# Altium PCB F800GSDayLight_line10x230 for Nuts.PcbDoc
Units mm, origin at the board's own origin, x right, y up, seen from the top; angles counter-clockwise.
Board outline 230 x 10 mm, 4 copper layers (Top Layer, Internal Plane 1, Internal Plane 2, Bottom Layer), stack 0.462 mm thick; 44 components, 24 nets, 88 pads, 15 vias.
Unrouted connection lines stored in the file: 58.
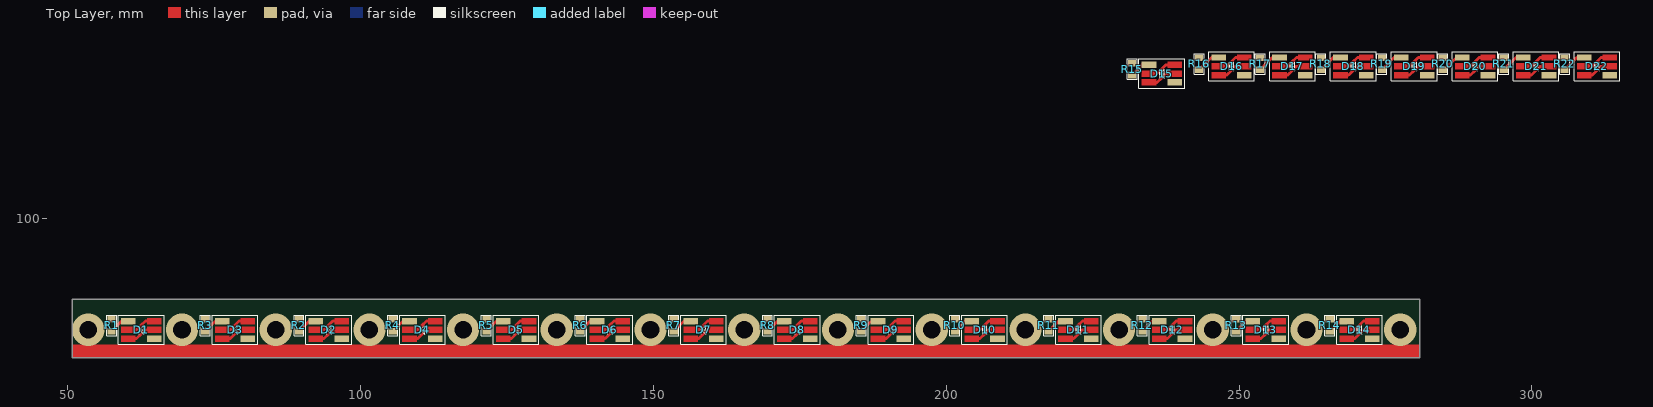
[diagram p0: Top Layer view]
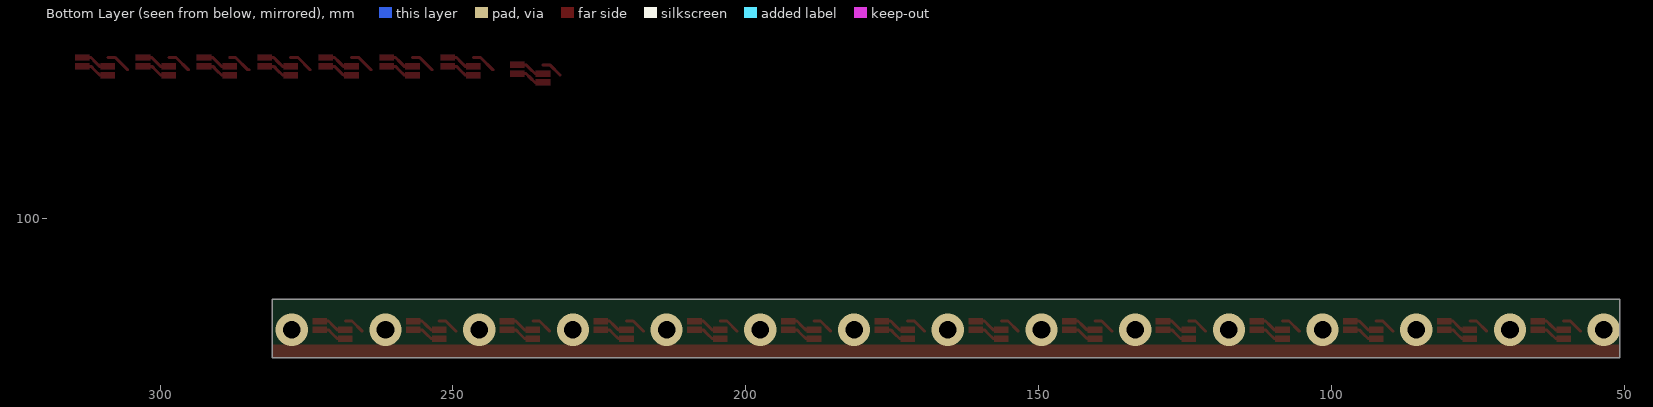
[diagram p1: Bottom Layer view, seen from below]
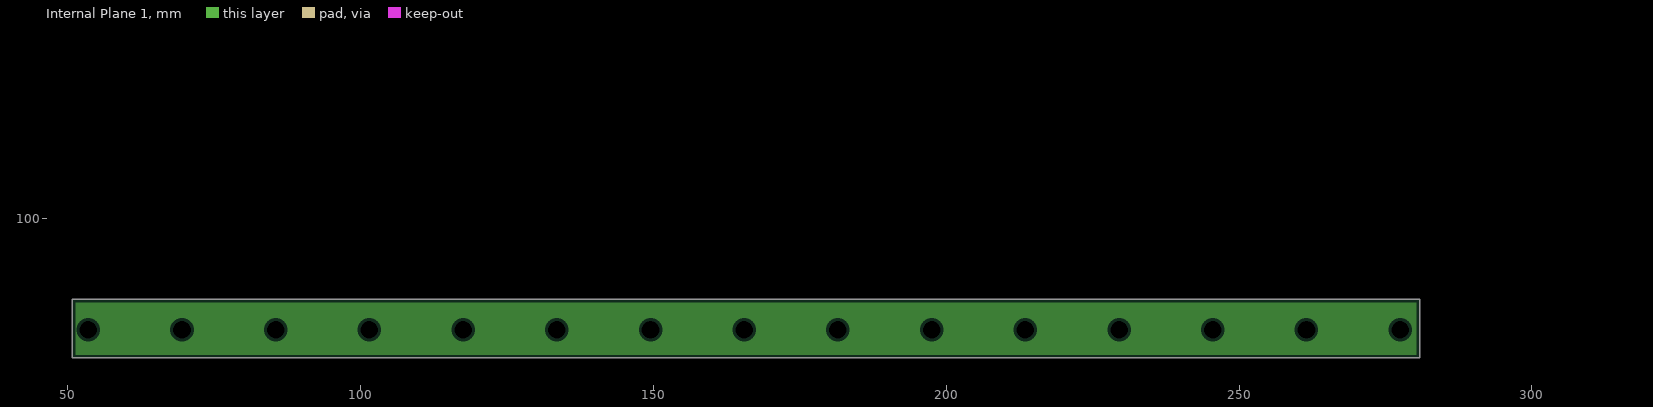
[diagram p2: Internal Plane 1, clearances drawn from the general rule]
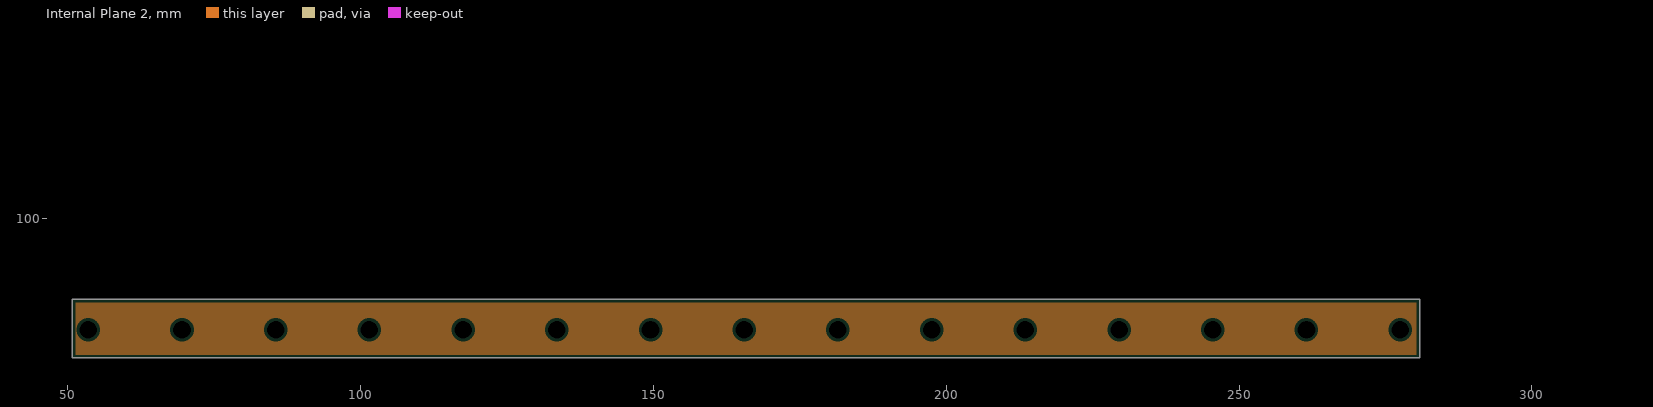
[diagram p3: Internal Plane 2, clearances drawn from the general rule]

## Layer stack, top to bottom
Top Solder: solder mask 0.0102, Solder Resist, Dk 3.5
Top Layer: signal copper 0.0356
Internal Plane 1: plane copper 0.0356
Internal Plane 2: plane copper 0.0356
Dielectric 1: dielectric 0.32, FR-4, Dk 4.8
Bottom Layer: signal copper 0.0356
Bottom Solder: solder mask 0.0102, Solder Resist, Dk 3.5

## Board outline
50.8,76.2 280.8,76.2 280.8,86.2 50.8,86.2

## Design rules (kind name [scope] priority, off if disabled: settings)
Clearance [All] p1: gap=0.2
PlaneClearance [All] p1: clearance=0.508
PlaneConnect [All] p1: planeconnectstyle=Relief reliefexpansion=0.508 reliefentries=4 reliefconductorwidth=0.254 reliefairgap=0.254
PolygonConnect [All] p1: connectstyle=Relief reliefconductorwidth=0.254 reliefentries=4 polygonreliefangle="90 Angle" airgapwidth=0.254
RoutingVias [All] p1: holewidth=0.4 width=3 viastyle="Through Hole" minholewidth=0.711 minwidth=1.27 maxholewidth=0.711 maxwidth=1.27
SolderMaskExpansion [All] p1: expansion=0.102
Width [All] p1: maxlimit=2 minlimit=0.2 preferedwidth=1
27 further rules are at their usual default settings.

## Components (designator, comment, footprint, x,y, rotation, side; value= is the part's Value field where it differs from the comment)
D1 "Cold White" "LED SMD 5050 White compact R" 64.75,79.5 r180 top
D2 "Cold White" "LED SMD 5050 White compact R" 96.75,79.5 r180 top
D3 "Cold White" "LED SMD 5050 White compact R" 80.75,79.5 r180 top
D4 "Cold White" "LED SMD 5050 White compact R" 112.75,79.5 r180 top
D5 "Cold White" "LED SMD 5050 White compact R" 128.75,79.5 r180 top
D6 "Cold White" "LED SMD 5050 White compact R" 144.75,79.5 r180 top
D7 "Cold White" "LED SMD 5050 White compact R" 160.75,79.5 r180 top
D8 "Cold White" "LED SMD 5050 White compact R" 176.75,79.5 r180 top
D9 "Cold White" "LED SMD 5050 White compact R" 192.75,79.5 r180 top
D10 "Cold White" "LED SMD 5050 White compact R" 208.75,79.5 r180 top
D11 "Cold White" "LED SMD 5050 White compact R" 224.75,79.5 r180 top
D12 "Cold White" "LED SMD 5050 White compact R" 240.75,79.5 r180 top
D13 "Cold White" "LED SMD 5050 White compact R" 256.75,79.5 r180 top
D14 "Cold White" "LED SMD 5050 White compact R" 272.75,79.5 r180 top
D15 "Cold White" "LED SMD 5050 White compact R" 239,123.25 r180 top
D16 "Cold White" "LED SMD 5050 White compact R" 250.9,124.5 r180 top
D17 "Cold White" "LED SMD 5050 White compact R" 261.3,124.5 r180 top
D18 "Cold White" "LED SMD 5050 White compact R" 271.7,124.5 r180 top
D19 "Cold White" "LED SMD 5050 White compact R" 282.1,124.5 r180 top
D20 "Cold White" "LED SMD 5050 White compact R" 292.5,124.5 r180 top
D21 "Cold White" "LED SMD 5050 White compact R" 302.9,124.5 r180 top
D22 "Cold White" "LED SMD 5050 White compact R" 313.3,124.5 r180 top
R1 "240Om" "SMD 0805 (2012)" 57.5,80.75 r90 top
R2 "240Om" "SMD 0805 (2012)" 89.5,80.75 r90 top
R3 "240Om" "SMD 0805 (2012)" 73.5,80.75 r90 top
R4 "240Om" "SMD 0805 (2012)" 105.5,80.75 r90 top
R5 "240Om" "SMD 0805 (2012)" 121.5,80.75 r90 top
R6 "240Om" "SMD 0805 (2012)" 137.5,80.75 r90 top
R7 "240Om" "SMD 0805 (2012)" 153.5,80.75 r90 top
R8 "240Om" "SMD 0805 (2012)" 169.5,80.75 r90 top
R9 "240Om" "SMD 0805 (2012)" 185.5,80.75 r90 top
R10 "240Om" "SMD 0805 (2012)" 201.5,80.75 r90 top
R11 "240Om" "SMD 0805 (2012)" 217.5,80.75 r90 top
R12 "240Om" "SMD 0805 (2012)" 233.5,80.75 r90 top
R13 "240Om" "SMD 0805 (2012)" 249.5,80.75 r90 top
R14 "240Om" "SMD 0805 (2012)" 265.5,80.75 r90 top
R15 "240Om" "SMD 0805 (2012)" 231.75,124.5 r90 top
R16 "240Om" "SMD 0805 (2012)" 243.2,125.4 r90 top
R17 "240Om" "SMD 0805 (2012)" 253.6,125.4 r90 top
R18 "240Om" "SMD 0805 (2012)" 264,125.4 r90 top
R19 "240Om" "SMD 0805 (2012)" 274.4,125.4 r90 top
R20 "240Om" "SMD 0805 (2012)" 284.8,125.4 r90 top
R21 "240Om" "SMD 0805 (2012)" 295.2,125.4 r90 top
R22 "240Om" "SMD 0805 (2012)" 305.6,125.4 r90 top

## Footprints (in the part's own frame and the unit in brackets; to place one, negate y for a bottom-side part, rotate by r counter-clockwise, add the part's x,y. Pads: shape width x height; smd on the part's side, far side on the other; paste and mask are expansions set on the pad)
"LED SMD 5050 White compact R" [mm]
  rect 2.5x1.1 smd: A(0,0) K(4.4,-3)
  Top Layer region: 3.15,-0.55 5.65,-0.55 5.65,0.55 3.15,0.55
  Top Layer region: 3.15,-2.05 5.65,-2.05 5.65,-0.95 3.15,-0.95
  Top Layer region: -1.25,-2.05 1.25,-2.05 1.25,-0.95 -1.25,-0.95
  Top Layer region: -1.25,-3.55 1.25,-3.55 1.25,-2.45 -1.25,-2.45
  Top Layer lines w0.5: 4.4,0 3,0 2.2,-0.8 1.5,-1.5 0,-1.5 ; 4.4,-1.5 3,-1.5 2.3,-2.2 1.5,-3 0,-3
  silkscreen extent -1.7,-4 6.1,1, body extent -0.45,-4 4.85,1, height 1.6
"SMD 0805 (2012)" [mil]
  rect 45x55 smd: 1(0.35,0.98) 2(80.35,0.98)
  silkscreen extent -29,-32 109,34, body extent 1,-24 80,26, height 18

## Part data
D1 D2 D3 D4 D5 D6 D7 D8 D9 D10 D11 D12 D13 D14 D15 D16 D17 D18 D19 D20 D21 D22: library part "Led SMD White Cold", "?3v ?20mA"
R1 R2 R3 R4 R5 R6 R7 R8 R9 R10 R11 R12 R13 R14 R15 R16 R17 R18 R19 R20 R21 R22: library part "Res All Types"

## Via types
v1: diameter 5.5, hole 3, Top Layer to Bottom Layer, 15 vias

## Nets (pads, with @x,y where several pads share a name; then routed paths per layer and width w, separated by ;. In a path a pad name is that pad's centre, name@x,y a point inside that pad or via, vN(x,y) a via of type N, cw(c..) or ccw(c..) an arc to the next point about the centre after c; other vN are vias at no path point)
GND: R1.2 R2.2 R3.2 R4.2 R5.2 R6.2 R7.2 R8.2 R9.2 R10.2 R11.2 R12.2 R13.2 R14.2 R15.2 R16.2 R17.2 R18.2 R19.2 R20.2 R21.2 R22.2
  other v1: 53.5,81 69.5,81 85.5,81 101.5,81 117.5,81 133.5,81 149.5,81 165.5,81 181.5,81 197.5,81 213.5,81 229.5,81 245.5,81 261.5,81 277.5,81
NetD1_K: D1.K R1.1 | length 3.6
  Top Layer w0.5: R1.1 59.216,82.5 D1.K
NetD2_K: D2.K R2.1 | length 3.6
  Top Layer w0.5: R2.1 91.216,82.5 D2.K
NetD3_K: D3.K R3.1 | length 3.6
  Top Layer w0.5: R3.1 75.216,82.5 D3.K
NetD4_K: D4.K R4.1 | length 3.6
  Top Layer w0.5: R4.1 107.216,82.5 D4.K
NetD5_K: D5.K R5.1 | length 3.6
  Top Layer w0.5: R5.1 123.216,82.5 D5.K
NetD6_K: D6.K R6.1 | length 3.6
  Top Layer w0.5: R6.1 139.216,82.5 D6.K
NetD7_K: D7.K R7.1 | length 3.6
  Top Layer w0.5: R7.1 155.216,82.5 D7.K
NetD8_K: D8.K R8.1 | length 3.6
  Top Layer w0.5: R8.1 171.216,82.5 D8.K
NetD9_K: D9.K R9.1 | length 3.6
  Top Layer w0.5: R9.1 187.216,82.5 D9.K
NetD10_K: D10.K R10.1 | length 3.6
  Top Layer w0.5: R10.1 203.216,82.5 D10.K
NetD11_K: D11.K R11.1 | length 3.6
  Top Layer w0.5: R11.1 219.216,82.5 D11.K
NetD12_K: D12.K R12.1 | length 3.6
  Top Layer w0.5: R12.1 235.216,82.5 D12.K
NetD13_K: D13.K R13.1 | length 3.6
  Top Layer w0.5: R13.1 251.216,82.5 D13.K
NetD14_K: D14.K R14.1 | length 3.6
  Top Layer w0.5: R14.1 267.216,82.5 D14.K
NetD15_K: D15.K R15.1 | length 3.6
  Top Layer w0.5: R15.1 233.466,126.25 D15.K
NetD16_K: D16.K R16.1 | length 4.2
  Top Layer w0.5: R16.1 245.266,127.5 D16.K
NetD17_K: D17.K R17.1 | length 4.2
  Top Layer w0.5: R17.1 255.666,127.5 D17.K
NetD18_K: D18.K R18.1 | length 4.2
  Top Layer w0.5: R18.1 266.066,127.5 D18.K
NetD19_K: D19.K R19.1 | length 4.2
  Top Layer w0.5: R19.1 276.466,127.5 D19.K
NetD20_K: D20.K R20.1 | length 4.2
  Top Layer w0.5: R20.1 285.009,125.409 287.1,127.5 D20.K
NetD21_K: D21.K R21.1 | length 4.2
  Top Layer w0.5: R21.1 297.266,127.5 D21.K
NetD22_K: D22.K R22.1 | length 4.2
  Top Layer w0.5: R22.1 307.666,127.5 D22.K
VCC: D1.A D2.A D3.A D4.A D5.A D6.A D7.A D8.A D9.A D10.A D11.A D12.A D13.A D14.A D15.A D16.A D17.A D18.A D19.A D20.A D21.A D22.A

## Other copper
Top Layer:
  rectangle net VCC: 50.8,76.2 280.8,78.5